# EAGLE board fMeter-preamp (EAGLE 5.07)
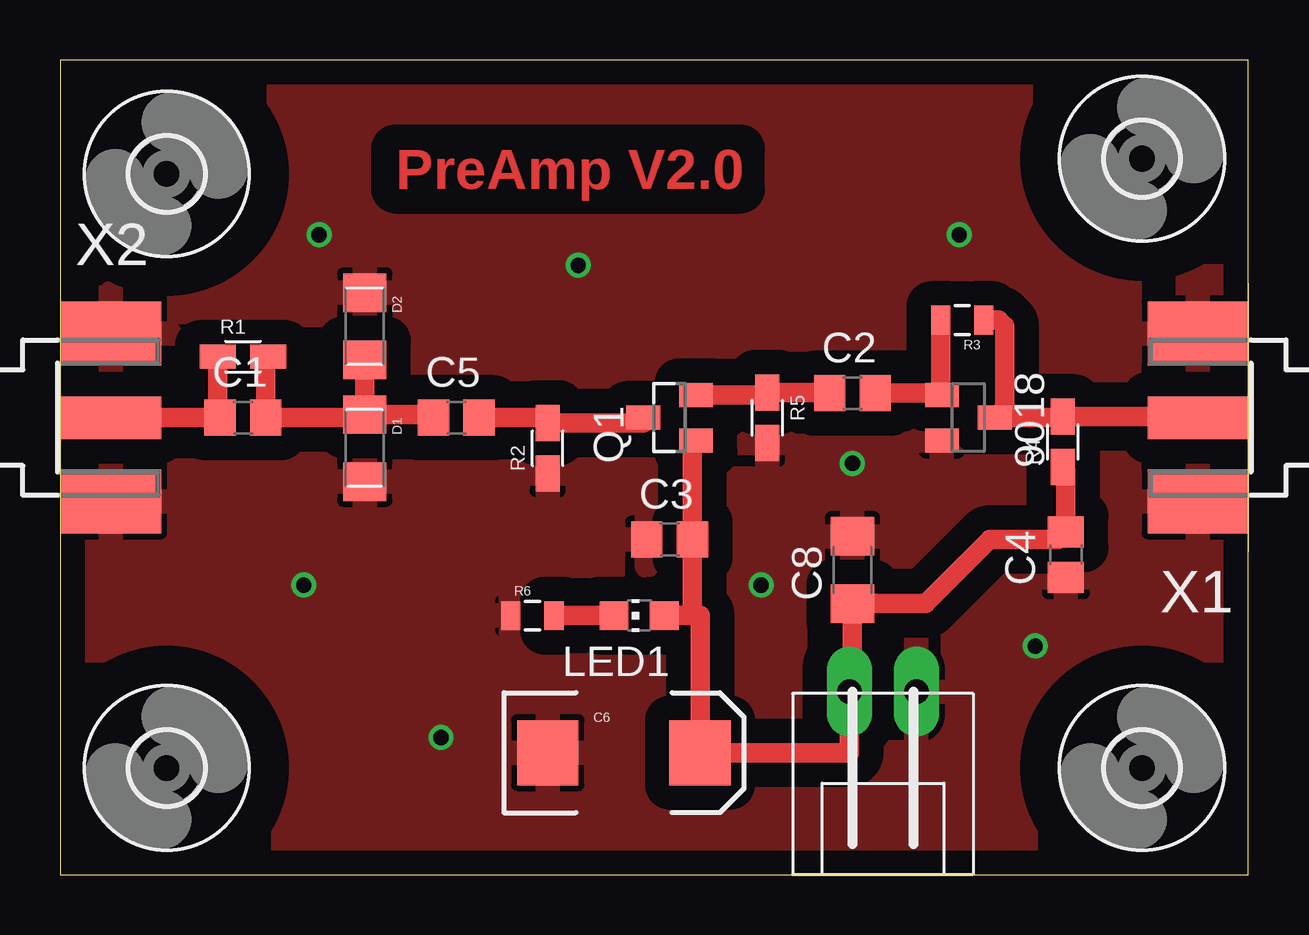
[diagram p0: board, top side]
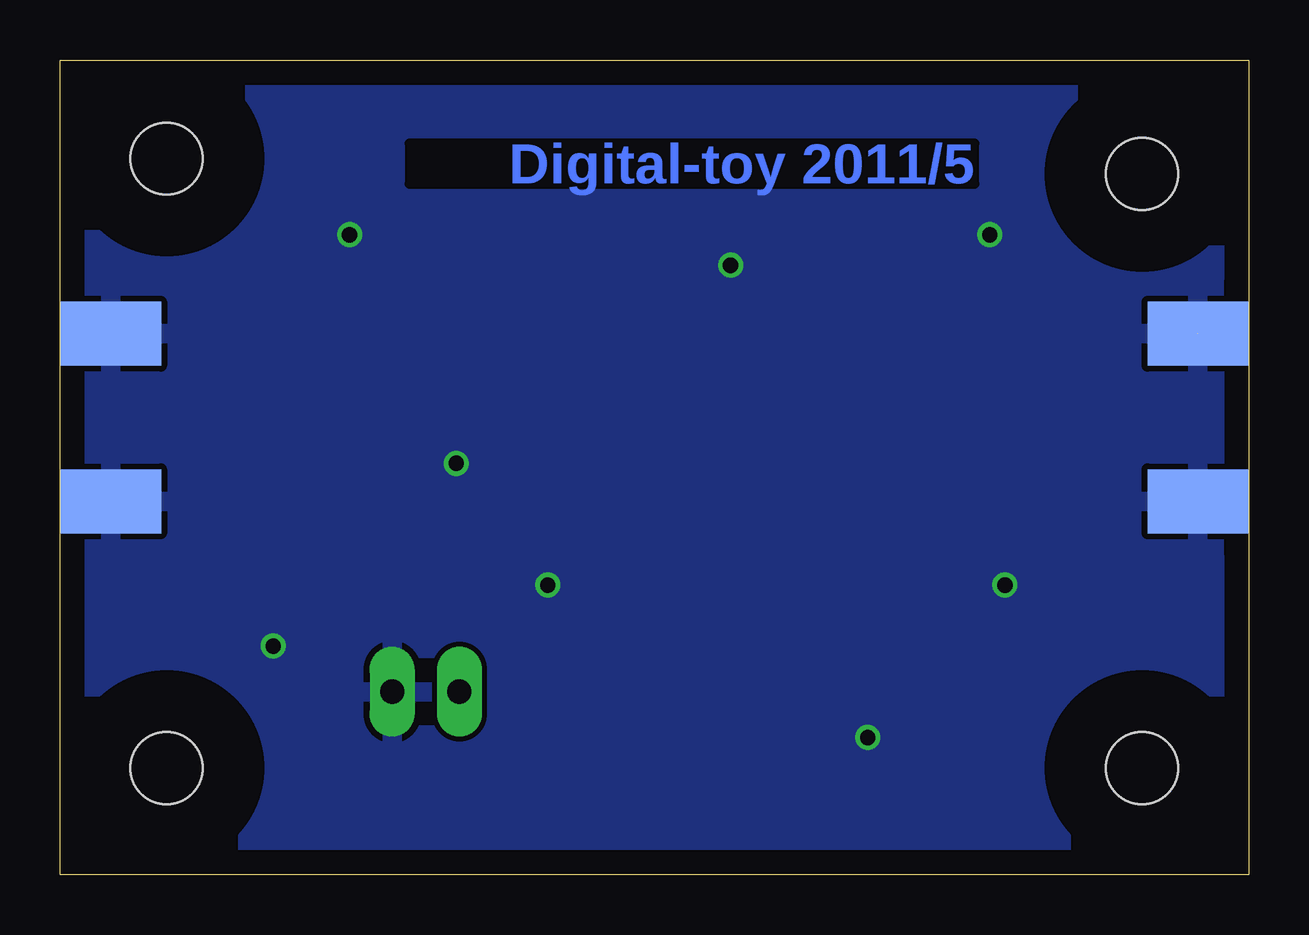
[diagram p1: board, bottom side, seen from below]

Size 49.53 x 33.96 mm. Coordinates in mm from the lower left corner, seen from the top.
Outline: 0,0 49.51,0 49.51,33.96 0,33.96 0,0
Copper layers (1*16): Top 0.035mm / dielectric 1.5mm / Bottom 0.035mm
Design rules "default": minimum track width 10mil, minimum drill 24mil, track to track 8mil, track to pad 8mil, pad to pad 8mil, via to via 8mil, smd to smd 8mil, copper to edge 40mil, drill to drill 8mil, minimum pad ring 10mil, minimum via ring 8mil, stop-mask expansion 4mil, vias tented up to drill 0mil, thermal gap 10mil

## Footprints (pad centres in the part's own frame; a part is rotated, then mirrored left to right if it is on the bottom)
SOT23-BEC = smd 1 x 1.4: B -0.95,-1.1; C 0,1.1; E 0.95,-1.1
C0805 = smd 1.3 x 1.5: 1 -0.95,0; 2 0.95,0
EIA7343 = smd 2.55 x 2.7: A 3.17,0; C -3.17,0
C1206 = smd 1.6 x 1.8: 1 -1.4,0; 2 1.4,0
1206-DIODE = smd 1.6 x 1.8: A -1.4,0; K 1.4,0
3,0 = hole 3: 0,0
XH-1X2-LONG-LOCK = drill 1.016 pad 1.88 long: 1 1.397,0; 2 -1.397,0
CHIP-LED0805 = smd 1.2 x 1.2: A 0,-1.05; C 0,1.05
SOT23 = smd 1 x 1.4: 1 -0.95,-1.1; 2 0.95,-1.1; 3 0,1.1
R0805W = smd 1.5 x 1: 1 -1.052,0; 2 1.052,0
0805 = smd 0.8 x 1.2: 1 -0.9,0; 2 0.9,0
SMA-KE = smd 4.191 x 1.778: 1 2.115,0 | smd 4.191 x 2.667: G@1 2.115,3.495; G@2 2.115,-3.495 | smd 4.191 x 2.667 bottom: G@3 2.115,3.495; G@4 2.115,-3.495

## Placement (x,y rotation side)
9018  [SOT23-BEC]  37.85,19.05 270 top
C1  331  [C0805]  7.62,19.05 0 top
C2  103  [C0805]  33.02,20.07 0 top
C3  103  [C0805]  25.4,13.97 0 top
C4  103  [C0805]  41.91,13.34 90 top
C5  103  [C0805]  16.51,19.05 0 top
C6  10uf  [EIA7343]  23.5,5.08 0 top
C8  [C1206]  33.02,12.7 90 top
D1  4148  [1206-DIODE]  12.7,17.78 270 top
D2  4148  [1206-DIODE]  12.7,22.86 270 top
H1  MOUNT-HOLE3.0  [3,0]  4.45,4.45 0 top
H2  MOUNT-HOLE3.0  [3,0]  45.09,29.84 0 top
H3  MOUNT-HOLE3.0  [3,0]  4.45,29.21 0 top
H4  MOUNT-HOLE3.0  [3,0]  45.09,4.45 0 top
JP7  EXT  [XH-1X2-LONG-LOCK]  34.29,7.62 180 top
LED1  RED  [CHIP-LED0805]  24.13,10.79 90 top
Q1  SST5485  [SOT23]  25.4,19.05 90 top
R1  100R  [R0805W]  7.62,21.59 0 top
R2  1M  [R0805W]  20.32,17.78 90 top
R3  15k  [0805]  37.59,23.11 180 top
R4  1k  [R0805W]  41.78,18.03 90 top
R5  1k  [R0805W]  29.46,19.05 270 top
R6  1.3k  [0805]  19.68,10.79 0 top
X1  SMA--KE  [SMA-KE]  49.53,19.05 180 top
X2  SMA--KE  [SMA-KE]  0,19.05 0 top

## Library data of the parts
9018 C1-C6 C8 D1 D2 JP7 R1-R6 = digital-toy
H1-H4 = holes
LED1 = led
Q1 = transistor-fet
X1 X2 = dtoy-RF

## Nets
GND: 9018.E C3.1 C4.1 C6.C C8.2 D1.K D2.A JP7.2 R2.1 R5.2 R6.1 X1.G@1 X1.G@2 X1.G@3 X1.G@4 X2.G@1 X2.G@2 X2.G@3 X2.G@4
N$1: C1.1 R1.1 X2.1
N$2: C1.2 C5.1 D1.A D2.K R1.2
N$3: C2.1 Q1.2 R5.1
N$4: 9018.B C2.2 R3.2
N$5: 9018.C R3.1 R4.2 X1.1
N$6: C5.2 Q1.3 R2.2
N$32: LED1.C R6.2
VCC: C3.2 C4.2 C6.A C8.1 JP7.1 LED1.A Q1.1 R4.1

## Tracks (layer width: path | path; a pad name or v marks a point on that pad's centre or on a via)
GND  (via drill 0.64)  (1 unrouted)
  other vias: 10.79,26.67 21.59,25.4 37.47,26.67 15.88,5.71 10.16,12.06 40.64,9.53 29.21,12.06 33.02,17.14
  pour Top (isolate 1.016): 0,46.99 64.77,46.99 69.85,26.67 69.85,3.81 67.31,-15.24 2.54,-15.24 -11.43,1.27 -11.43,39.37
  pour Bottom: -5.71,34.92 50.8,34.92 55.88,29.84 55.88,3.81 48.26,-3.81 -1.27,-3.81 -6.99,1.91 -6.99,33.66
N$1
  Top 0.813: X2.1 C1.1 6.57,19.05 R1.1
N$2
  Top 0.813: D1.A 12.7,19.05 C1.2 8.57,21.49 R1.2 | D1.A 15.56,19.18 C5.1 | D1.A D2.K
N$3
  Top 0.813: Q1.2 29.46,20 R5.1 32.07,20.1 C2.1
N$4
  Top 0.813: C2.2 36.75,20.07 9018.B 36.69,20 R3.2
N$5
  Top 0.813: R3.1 39.12,23.11 39.37,22.86 39.37,19.47 9018.C 41.75,19.05 R4.2 47.38,19.09 X1.1
N$6
  Top 0.813: C5.2 20.32,19.05 R2.2 24.3,18.83 Q1.3
N$32
  Top 0.813: R6.2 LED1.C
VCC
  Top 0.813: 26.16,10.79 26.67,10.79 C6.A 32.89,5.08 JP7.1 33.02,7.62 C8.1 36.06,11.3 38.73,13.97 41.59,13.97 C4.2 41.91,16.86 R4.1 | 26.16,10.79 LED1.A | Q1.1 26.35,18.1 C3.2 26.35,10.98 26.16,10.79

## Text on the board
Top: PreAmp V2.0
Bottom: Digital-toy 2011/5